# EAGLE board PCB_MAT_BALISE (EAGLE 9.5.1)
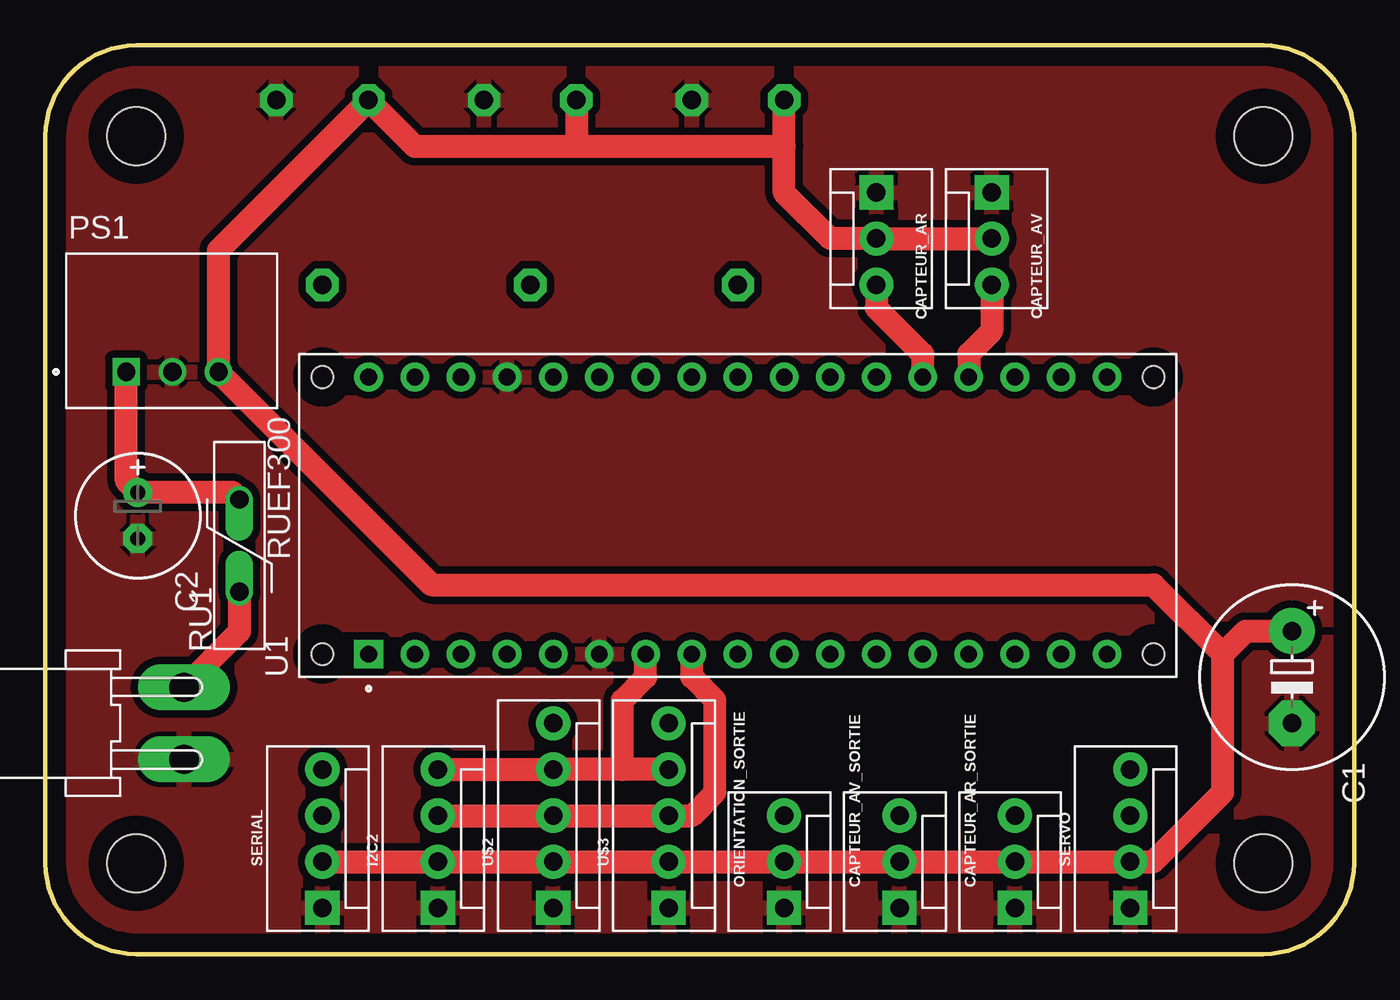
[diagram p0: board, top side]
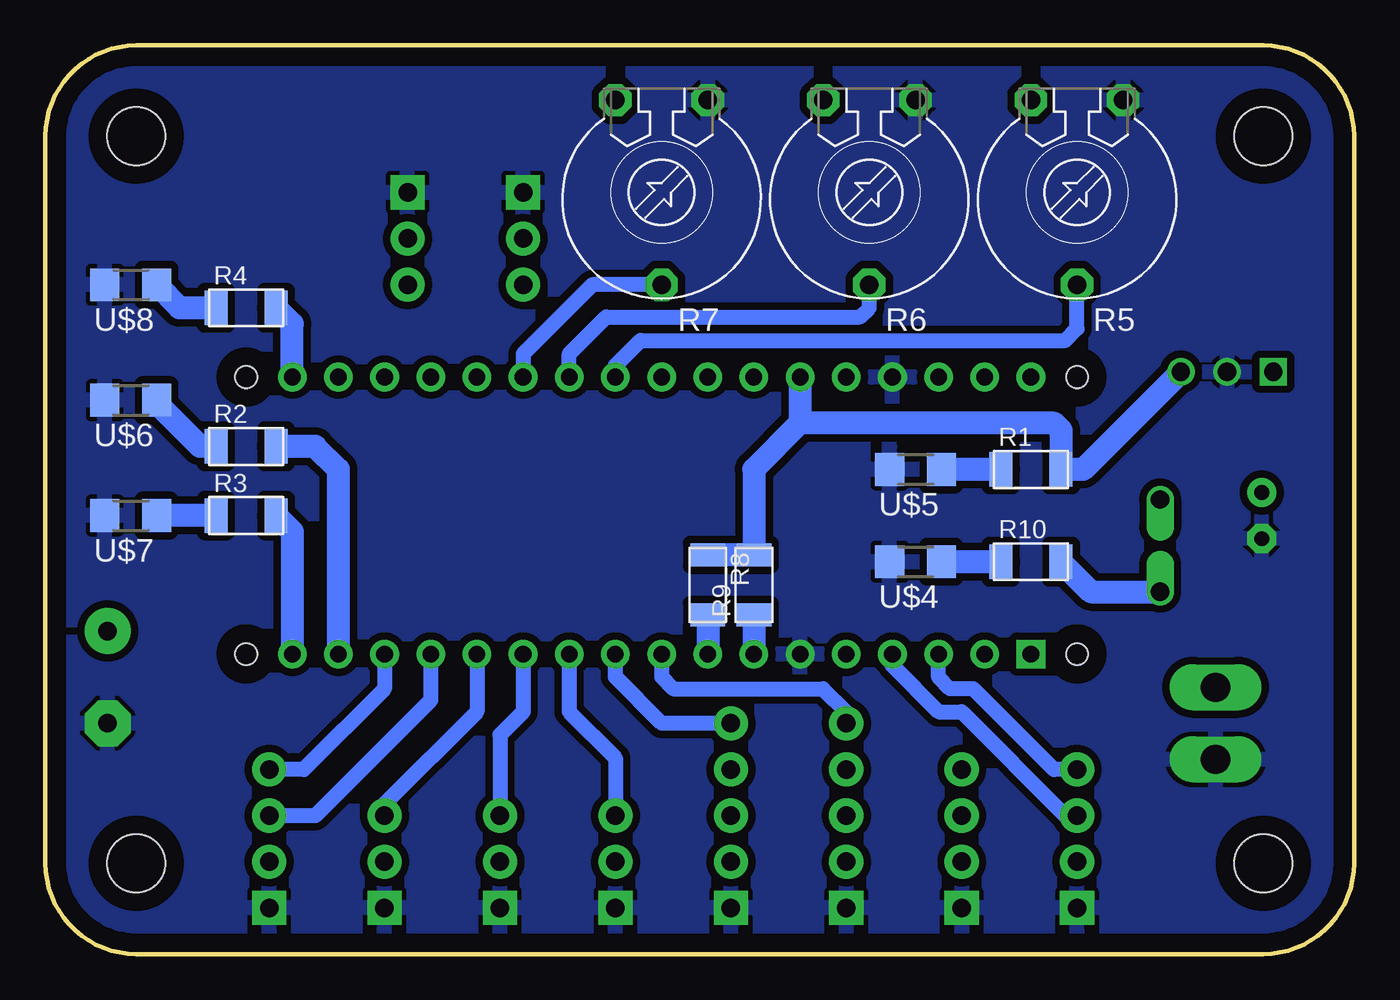
[diagram p1: board, bottom side, seen from below]

Size 72 x 50 mm. Coordinates in mm from the lower left corner, seen from the top.
Outline: 5,50 arc90 0,45 0,5 arc90 5,0 67,0 arc90 72,5 72,45 arc90 67,50 5,50
Copper layers (1*16): Top 0.035mm / dielectric 1.5mm / Bottom 0.035mm
Design rules "default": minimum track width 6mil, minimum drill 0.35mm, track to track 6mil, track to pad 6mil, pad to pad 6mil, via to via 6mil, smd to smd 6mil, copper to edge 40mil, drill to drill 6mil, minimum pad ring 10mil, minimum via ring 8mil, stop-mask expansion 4mil, vias tented up to drill 0mil, thermal gap 10mil
Holes 3.2 mm at 67,45 67,5 5,5 5,45

## Footprints (pad centres in the part's own frame; a part is rotated, then mirrored left to right if it is on the bottom)
E5-10,5 = drill 1.016 pad 2.54: + -2.54,0 | drill 1.016 pad 2.54 octagon: - 2.54,0
E2,5-7 = drill 0.813 pad 1.6: + -1.27,0 | drill 0.813 pad 1.6 octagon: - 1.27,0
MOLEX-1X3 = drill 1.016 pad 1.88 square: 1 0,0 | drill 1.016 pad 1.88: 2 2.54,0; 3 5.08,0
MOLEX-1X4 = drill 1.016 pad 1.88 square: 1 0,0 | drill 1.016 pad 1.88: 2 2.54,0; 3 5.08,0; 4 7.62,0
CONV_R-78E5.0-1.0 = drill 1 square: 1 -2.54,-2.25 | drill 1: 2 0,-2.25; 3 2.54,-2.25
R1206FAB = smd 1.27 x 1.905: 1 -1.651,0; 2 1.651,0
PT-10 = drill 1.016 pad 1.778 octagon: 1 -2.54,-5.08; 2 2.54,-5.08; 3 0,5.08
RUEF300 = drill 1 offset: P$1 -2.54,0; P$2 2.54,0
ARDUINO_A000053 = drill 0.914 pad 1.575 square: 1 -7.62,20.32 | drill 0.914 pad 1.575: 2 -7.62,17.78; 3 -7.62,15.24; 4 -7.62,12.7; 5 -7.62,10.16; 6 -7.62,7.62; 7 -7.62,5.08; 8 -7.62,2.54; 9 -7.62,0; 10 -7.62,-2.54; 11 -7.62,-5.08; 12 -7.62,-7.62; 13 -7.62,-10.16; 14 -7.62,-12.7; 15 -7.62,-15.24; 16 -7.62,-17.78; 17 -7.62,-20.32; 18 7.62,-20.32; 19 7.62,-17.78; 20 7.62,-15.24; 21 7.62,-12.7; 22 7.62,-10.16; 23 7.62,-7.62; 24 7.62,-5.08; 25 7.62,-2.54; 26 7.62,0; 27 7.62,2.54; 28 7.62,5.08; 29 7.62,7.62; 30 7.62,10.16; 31 7.62,12.7; 32 7.62,15.24; 33 7.62,17.78; 34 7.62,20.32 | hole 1.2: -7.62,-22.86; 7.62,-22.86; -7.62,22.86; 7.62,22.86
NSK396-2C = drill 1.6 pad 2.54 long: P$1 -1.98,0; P$2 1.98,0
MOLEX-1X5 = drill 1.016 pad 1.88 square: 1 0,0 | drill 1.016 pad 1.88: 2 2.54,0; 3 5.08,0; 4 7.62,0; 5 10.16,0
LED1206 = smd 1.6 x 1.803: 1 -1.422,0; 2 1.422,0

## Placement (x,y rotation side)
C1  470uF  [E5-10,5]  68.58,15.24 270 top
C2  10uF  [E2,5-7]  5.08,24.13 270 top
CAPTEUR_AR  [MOLEX-1X3]  45.72,41.91 270 top
CAPTEUR_AR_SORTIE  [MOLEX-1X3]  53.34,2.54 90 top
CAPTEUR_AV  [MOLEX-1X3]  52.07,41.91 270 top
CAPTEUR_AV_SORTIE  [MOLEX-1X3]  46.99,2.54 90 top
I2C2  [MOLEX-1X4]  21.59,2.54 90 top
ORIENTATION_SORTIE  [MOLEX-1X3]  40.64,2.54 90 top
PS1  R-78E5.0-1.0  [CONV_R-78E5.0-1.0]  6.99,34.29 0 top
R1  [R1206FAB]  17.78,26.67 0 bottom
R2  [R1206FAB]  60.96,27.94 0 bottom
R3  [R1206FAB]  60.96,24.13 0 bottom
R4  [R1206FAB]  60.96,35.56 0 bottom
R5  [PT-10]  15.24,41.91 180 bottom
R6  [PT-10]  26.67,41.91 180 bottom
R7  [PT-10]  38.1,41.91 180 bottom
R8  [R1206FAB]  35.56,20.32 270 bottom
R9  [R1206FAB]  33.02,20.32 90 bottom
R10  [R1206FAB]  17.78,21.59 0 bottom
RU1  RUEF300  [RUEF300]  10.67,22.48 90 top
SERIAL  [MOLEX-1X4]  15.24,2.54 90 top
SERVO  [MOLEX-1X4]  59.69,2.54 90 top
U1  A000053  [ARDUINO_A000053]  38.1,24.13 90 top
U$1  CONN_02_PUI  [NSK396-2C]  7.62,12.7 90 top
U$2  CONN_05  [MOLEX-1X5]  27.94,2.54 90 top
U$3  CONN_05  [MOLEX-1X5]  34.29,2.54 90 top
U$4  LED  [LED1206]  24.13,21.59 180 bottom
U$5  LED  [LED1206]  24.13,26.67 180 bottom
U$6  LED  [LED1206]  67.31,30.48 180 bottom
U$7  LED  [LED1206]  67.31,24.13 180 bottom
U$8  LED  [LED1206]  67.31,36.83 180 bottom

## Library data of the parts
C1 C2 = rcl; SPICEPREFIX: C
CAPTEUR_AR CAPTEUR_AR_SORTIE CAPTEUR_AV CAPTEUR_AV_SORTIE ORIENTATION_SORTIE = CONNECTORS; PROD_ID: CONN-08625; SF_ID: PRT-08096
I2C2 SERIAL SERVO = CONNECTORS; PROD_ID: CONN-08186; SF_ID: PRT-08231
PS1 = KARIBOUS; DESCRIPTION: R-78E-1 Series 5 W 8 to 28 Vin 5 V Output DC/DC Converter - SIP-3; DIGI-KEY_PART_NUMBER: 945-2201-ND; DIGI-KEY_PURCHASE_URL: https://www.digikey.com/product-detail/en/recom-power/R-78E5.0-1.0/945-2201-ND/4930585?utm_source=snapeda&utm_medium=aggregator&utm_campaign=symbol; MF: Recom Power; MP: R-78E5.0-1.0; PACKAGE: SIP-3 Recom Power
R1-R4 R8-R10 U$4-U$8 = fab
R5-R7 = rcl; SPICEMODEL: POT; SPICEPREFIX: X
RU1 U$1 = OPENBOT
U1 = A000053; AVAILABILITY: Unavailable; DESCRIPTION: MCU, ARDUINO MICRO, LEONARDO BASED, ATMEGA32u4, 5V, USB-MICRO; MF: Arduino; MP: A000053; PACKAGE: None; PRICE: None
U$2 U$3 = CONNECTORS

## Nets
3.3V: U1.19
+5V: C1.+ CAPTEUR_AR.2 CAPTEUR_AR_SORTIE.2 CAPTEUR_AV.2 CAPTEUR_AV_SORTIE.2 I2C2.2 ORIENTATION_SORTIE.2 PS1.3 R1.2 R5.2 R6.2 R7.2 R8.1 R9.2 SERIAL.2 SERVO.2 U1.29 U$2.2 U$3.2
+24V: R10.2 RU1.P$1 U$1.P$2
CAPT_AR: CAPTEUR_AR.3 U1.22
CAPT_AR_SORTIE: CAPTEUR_AR_SORTIE.3 U1.13
CAPT_AV: CAPTEUR_AV.3 U1.21
CAPT_AV_SORTIE: CAPTEUR_AV_SORTIE.3 U1.12
DETECT_AR: R3.2 U1.17
DETECT_AV: R2.2 U1.16
EMITT_1: R4.2 U1.18
GND: C1.- C2.- CAPTEUR_AR.1 CAPTEUR_AR_SORTIE.1 CAPTEUR_AV.1 CAPTEUR_AV_SORTIE.1 I2C2.1 ORIENTATION_SORTIE.1 PS1.2 R5.1 R6.1 R7.1 SERIAL.1 SERVO.1 U1.6 U1.31 U$1.P$1 U$2.1 U$3.1 U$4.2 U$5.2 U$6.2 U$7.2 U$8.2
N$1: R1.1 U$5.1
N$2: R2.1 U$6.1
N$3: R3.1 U$7.1
N$4: R4.1 U$8.1
N$5: C2.+ PS1.1 RU1.P$2
N$6: R10.1 U$4.1
N$10: U1.26
ORIENTATION_SORTIE: ORIENTATION_SORTIE.3 U1.11
RX: SERIAL.3 U1.4
SCL: I2C2.3 R8.2 U1.8 U$2.3 U$3.3
SDA: I2C2.4 R9.1 U1.7 U$2.4 U$3.4
SIGNAL_1: R6.3 U1.24
SIGNAL_2: R5.3 U1.25
SIGNAL_ORIENTATION: SERVO.3 U1.14
SIGNAL_SERVO: SERVO.4 U1.15
TX: SERIAL.4 U1.3
VIN: U1.32
VITESSE_SERVO: R7.3 U1.23
XSHUT_AR: U1.9 U$2.5
XSHUT_AV: U1.10 U$3.5

## Tracks (layer width: path | path; a pad name or v marks a point on that pad's centre or on a via)
+5V
  Top 1.27: SERIAL.2 I2C2.2 U$2.2 U$3.2 ORIENTATION_SORTIE.2 CAPTEUR_AV_SORTIE.2 CAPTEUR_AR_SORTIE.2 SERVO.2 60.96,5.08 64.77,8.89 64.77,16.51 | 64.77,16.51 66.04,17.78 C1.+ | R6.2 29.21,44.45 | 29.21,44.45 20.32,44.45 R5.2 9.53,38.73 PS1.3 21.25,20.32 60.96,20.32 64.77,16.51 | 29.21,44.45 40.64,44.45 | 40.64,44.45 R7.2 | CAPTEUR_AV.2 CAPTEUR_AR.2 43.18,39.37 40.64,41.91 40.64,44.45
  Bottom 1.27: PS1.3 14.89,26.67 R1.2 16.13,28.83 16.51,29.21 30.48,29.21 | U1.29 30.48,29.21 | 30.48,29.21 33.02,26.67 R9.2 R8.1
+24V
  Top 1.27: RU1.P$1 10.67,17.73 U$1.P$2
  Bottom 1.27: R10.2 14.48,19.94 RU1.P$1
CAPT_AR
  Top 1.27: CAPTEUR_AR.3 45.72,35.56 48.26,33.02 U1.22
CAPT_AR_SORTIE
  Bottom 0.813: U1.13 48.26,13.34 53.34,8.26 CAPTEUR_AR_SORTIE.3
CAPT_AV
  Top 1.27: CAPTEUR_AV.3 52.07,34.29 50.8,33.02 U1.21
CAPT_AV_SORTIE
  Bottom 0.813: U1.12 45.72,13.34 46.99,12.06 CAPTEUR_AV_SORTIE.3
DETECT_AR
  Bottom 1.27: R3.2 58.42,23.24 U1.17
DETECT_AV
  Bottom 1.27: U1.16 55.88,26.67 57.15,27.94 R2.2
EMITT_1
  Bottom 1.27: U1.18 58.42,34.67 R4.2
GND
  pour Bottom (isolate 0.406): -2.54,0 -2.54,51.44 73.66,51.44 74.3,51.44 74.3,-2.54 -2.54,-2.54
  pour Top (isolate 0.406): -5.08,51.44 74.3,51.44 74.3,-2.54 -5.08,-2.54
N$1
  Bottom 1.27: R1.1 U$5.1
N$2
  Bottom 1.27: R2.1 63.5,27.94 65.89,30.33 U$6.1
N$3
  Bottom 1.27: R3.1 U$7.1
N$4
  Bottom 1.27: U$8.1 64.62,35.56 R4.1
N$5
  Top 1.27: RU1.P$2 10.29,25.4 C2.+ 4.45,26.04 PS1.1
N$6
  Bottom 1.27: R10.1 U$4.1
ORIENTATION_SORTIE
  Bottom 0.813: U1.11 43.18,13.34 40.64,10.79 ORIENTATION_SORTIE.3
RX
  Bottom 0.813: U1.4 25.4,15.88 22.86,13.34 21.59,13.34 15.88,7.62 SERIAL.3
SCL
  Top 1.27: I2C2.3 U$2.3 U$3.3 35.56,7.62 36.83,8.89 36.83,13.97 35.56,15.24 U1.8
  Bottom 1.27: R8.2 U1.8
SDA
  Top 1.27: I2C2.4 U$2.4 31.75,10.16 | U$3.4 31.75,10.16 | 31.75,10.16 31.75,13.97 33.02,15.24 U1.7
  Bottom 1.27: R9.1 U1.7
SIGNAL_1
  Bottom 0.813: U1.24 43.18,33.02 41.15,35.05 27.18,35.05 26.67,35.56 R6.3
SIGNAL_2
  Bottom 0.813: U1.25 40.64,32.38 39.25,33.77 15.88,33.77 15.24,34.41 R5.3
SIGNAL_ORIENTATION
  Bottom 0.813: U1.14 50.8,13.97 57.15,7.62 SERVO.3
SIGNAL_SERVO
  Bottom 0.813: U1.15 53.34,14.61 57.78,10.16 SERVO.4
TX
  Bottom 0.813: SERIAL.4 16.51,10.16 20.95,14.61 22.23,14.61 22.86,15.24 U1.3
VITESSE_SERVO
  Bottom 0.813: R7.3 41.91,36.83 45.72,33.02 U1.23
XSHUT_AR
  Bottom 0.813: U1.9 38.1,15.24 37.47,14.61 29.21,14.61 27.94,13.34 U$2.5
XSHUT_AV
  Bottom 0.813: U$3.5 38.1,12.7 40.64,15.24 U1.10